# Altium PCB 人体感应灯_PCB_AltiumDesigner.pcbdoc
Units mil, origin at the board's own origin, x right, y up, seen from the top; angles counter-clockwise.
Board outline 3289.35 x 2332 mil, 2 copper layers (Top Layer, Bottom Layer); 34 components, 51 nets, 137 pads, 62 vias.
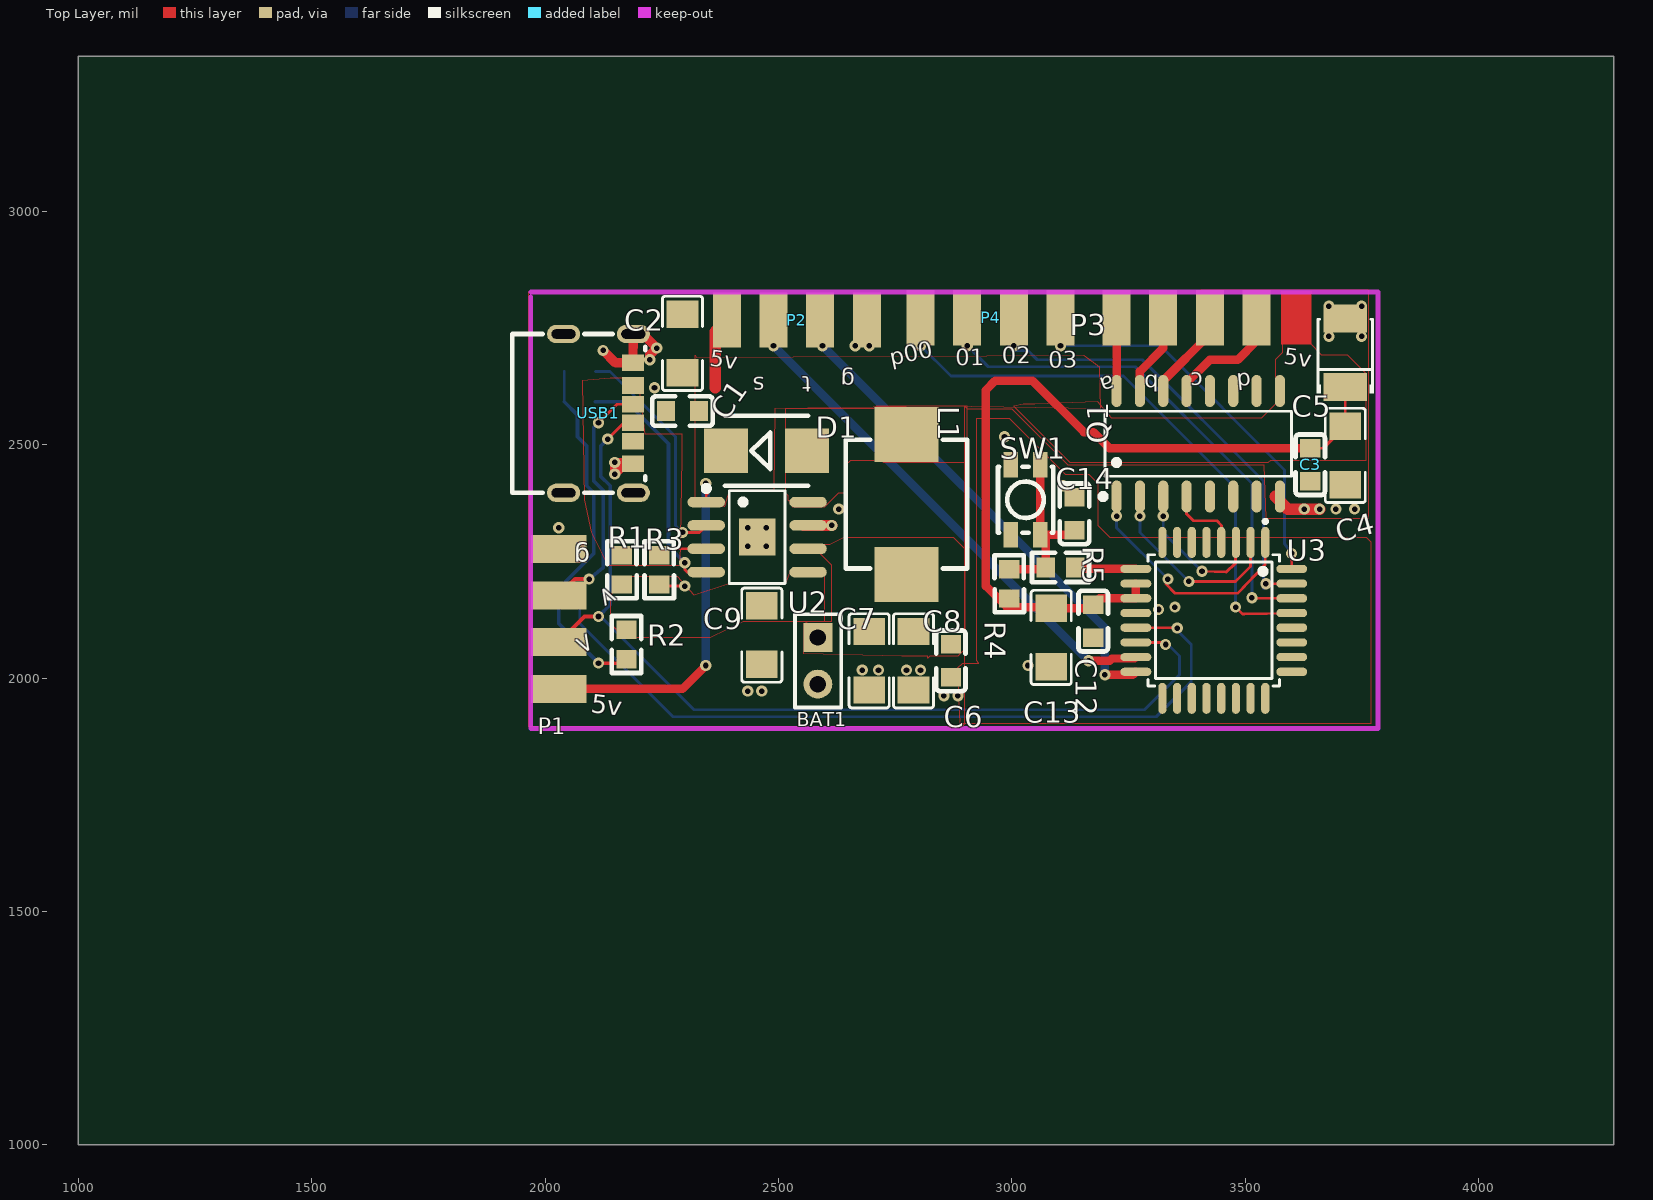
[diagram p0: Top Layer view]
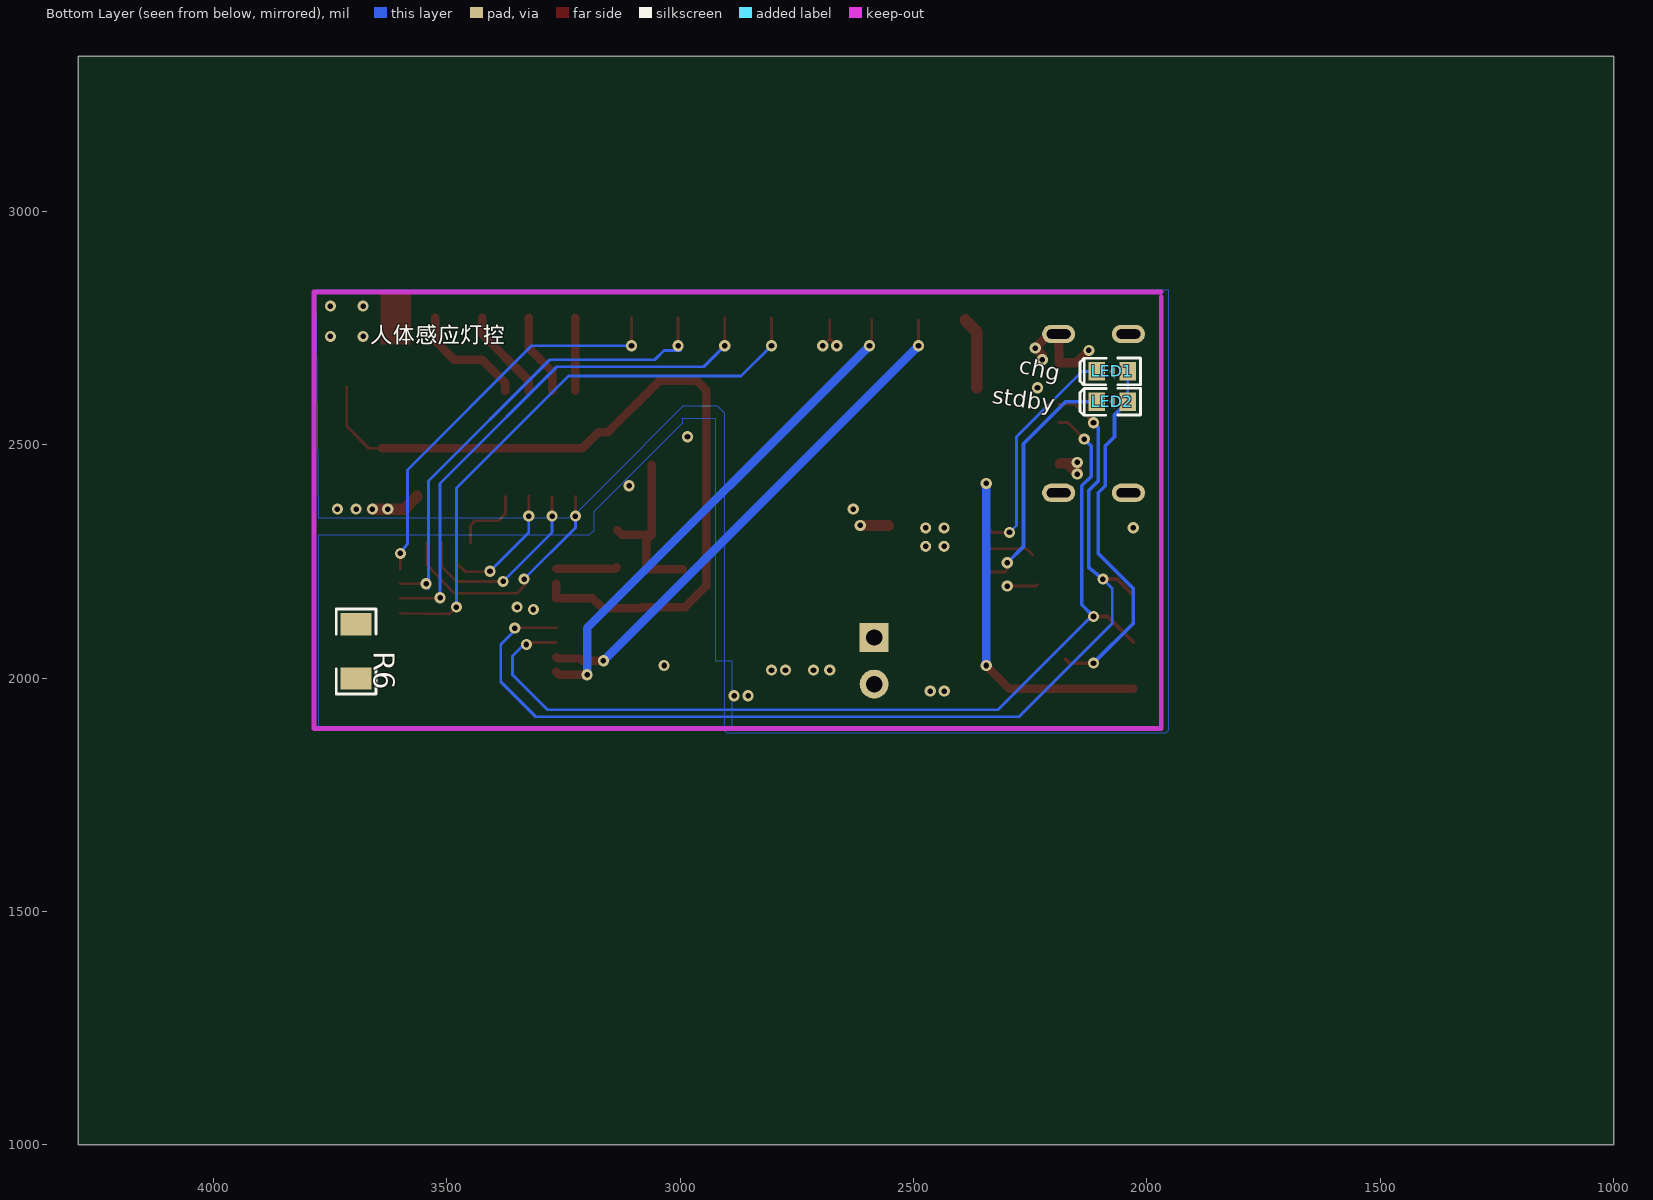
[diagram p1: Bottom Layer view, seen from below]

## Layer stack, top to bottom
Top Layer: signal copper (thickness not stored)
Dielectric: dielectric 12.6, FR-4, Dk 4.8
Bottom Layer: signal copper (thickness not stored)

## Board outline
4289.35,1000 1000,1000 1000,3332 4289.35,3332

## Components (designator, comment, footprint, x,y, rotation, side; value= is the part's Value field where it differs from the comment)
BAT1 "HDR-F-2.54_1x2" HDR-F-2.54_1X2 2584.36,2037 r270 top
C1 "0.1u" C0603 2294.36,2572 r0 top
C2 "47u" C1206 2294.36,2717 r270 top
C3 "0.1u" C0603 3639.36,2457 r90 top
C4 "22u" C1206 3714.36,2477 r90 top
C5 "100u" CASE-B_3528 3714.36,2697 r90 top
C6 "0.1u" C0603 2869.39,2037 r90 top
C7 "47u" C1206 2694.36,2037 r90 top
C8 "47u" C1206 2789.36,2037 r90 top
C9 "10u" C1206 2464.36,2092 r90 top
C12 "0.1u" C0603 3174.36,2122 r90 top
C13 "22u" C1206 3084.36,2087 r90 top
C14 "10u" C0603 3134.36,2352 r270 top
D1 "SS34" SMB -1525.64,5487 r0 top
L1 "10uH" 0630电感 2774.36,2372 r270 top
LED1 "LED-0603_R" LED0603_RED 2074.36,2657 r180 bottom
LED2 "LED-0603_R" LED0603_RED 2074.36,2592 r180 bottom
P1 "串口" 焊盘-2.54-4P 2029.36,1977 r90 top
P2 "外设传感" 焊盘-2.54-4P 2689.36,2767 r180 top
P3 "电机" 焊盘-2.54-4P 3224.36,2772 r0 top
P4 "引出" 焊盘-2.54-4P 3104.36,2772 r180 top
Q1 "ULN2003" SOP-16_L10.0-W3.9-P1.27-LS6.0-BL 3399.36,2502 r0 top
R1 "0.3" R0603 2164.36,2232 r270 top
R2 "1k" R0603 2174.36,2072 r90 top
R3 "1.1k" R0603 2244.36,2232 r270 top
R4 "10k" R0603 2994.36,2202 r270 top
R5 "310" R0603 3104.36,2237 r0 top
R6 "R1206" R1206 3694.36,2057 r90 bottom
SW1 "TS-1090S-AR01826" SW-SMD_4P-L3.5-W3.0-P1.50-LS4.7 3029.36,2382 r270 top
U2 "TP5400" SOIC-8_L5.0-W4.0-P1.27-LS6.0-BL-EP 2454.36,2302 r270 top
U3 "STC8H1K28-36I-LQFP32" LQFP-32_L7.0-W7.0-P0.80-LS9.0-BL 3432.76,2123.6 r180 top
USB1 "TYPEC-250D-BCP6" USB-C-SMD_TYPEC-250D-BCP6 2114.36,2567 r270 top
? "" ? 1738.18,2355.74 r0 top
? "" ? 2874.36,1704.98 r0 top

## Footprints (in the part's own frame and the unit in brackets; to place one, negate y for a bottom-side part, rotate by r counter-clockwise, add the part's x,y. Pads: shape width x height; smd on the part's side, far side on the other; paste and mask are expansions set on the pad)
0630电感 [mm]
  rect 3x3.5 smd: 1(-3.81,0) 2(3.81,0)
  silkscreen extent -3.51,-3.3 3.49,3.3
C0603 [mm]
  rect 1x1.1 smd: 1(-0.9,0) 2(0.9,0)
  silkscreen extent -1.65,-0.8 1.65,0.8
C1206 [mm]
  rect 1.485x1.728 smd: 1(-1.593,0) 2(1.593,0)
  silkscreen extent -2.56,-1.09 2.56,1.09
CASE-B_3528 [mil]
  rect 59.3x93.54 smd: 1(-73.25,0) 2(73.25,0)
  silkscreen extent -87,-61 72,61
HDR-F-2.54_1X2 [mil]
  rect 62x62 hole 35: 1(-50,0)
  round 62 hole 35: 2(50,0)
  silkscreen extent -100,-49 100,50
LED0603_RED [mm]
  rect 0.9x1 smd: 1(0.85,0) 2(-0.85,0)
  silkscreen extent -1.75,-0.73 1.54,0.73
LQFP-32_L7.0-W7.0-P0.80-LS9.0-BL [mm]
  oval 0.448x1.684 smd: 1(-2.8,-4.242) 2(-2,-4.242) 3(-1.2,-4.242) 4(-0.4,-4.242) 5(0.4,-4.242) 6(1.2,-4.242) 7(2,-4.242) 8(2.8,-4.242) 17(2.8,4.242) 18(2,4.242) 19(1.2,4.242) 20(0.4,4.242) 21(-0.4,4.242) 22(-1.2,4.242) 23(-2,4.242) 24(-2.8,4.242)
  oval 1.684x0.448 smd: 9(4.242,-2.8) 10(4.242,-2) 11(4.242,-1.2) 12(4.242,-0.4) 13(4.242,0.4) 14(4.242,1.2) 15(4.242,2) 16(4.242,2.8) 25(-4.242,2.8) 26(-4.242,2) 27(-4.242,1.2) 28(-4.242,0.4) 29(-4.242,-0.4) 30(-4.242,-1.2) 31(-4.242,-2) 32(-4.242,-2.8)
  silkscreen extent -3.58,-5.48 3.58,3.58
R0603 [mm]
  rect 1x1.1 smd: 1(-0.8,0) 2(0.8,0)
  silkscreen extent -1.55,-0.8 1.55,0.81
R1206 [mil]
  rect 47.54x66.97 smd: 1(58.22,0) 2(-58.22,0)
  silkscreen extent -91,-42 91,42
SMB [mil]
  rect 94.5x94.5 smd: A(4087,-3000) C(3913,-3000)
  silkscreen extent 3911,-3075 4089,-2925
SOIC-8_L5.0-W4.0-P1.27-LS6.0-BL-EP [mm]
  oval 0.574x2.038 smd: 1(-1.905,-2.769) 2(-0.635,-2.769) 3(0.635,-2.769) 4(1.905,-2.769) 5(1.905,2.769) 6(0.635,2.769) 7(-0.635,2.769) 8(-1.905,2.769)
  round 0.6 hole 0.3: 9(-0.5,0.5) 9(-0.5,-0.5) 9(0.5,0.5) 9(0.5,-0.5)
  rect 2x2 smd: 9(0,0)
  silkscreen extent -2.79,-2.92 2.53,1.52
SOP-16_L10.0-W3.9-P1.27-LS6.0-BL [mm]
  oval 0.56x1.745 smd: 1(-4.445,-2.873) 2(-3.175,-2.873) 3(-1.905,-2.873) 4(-0.635,-2.873) 5(0.635,-2.873) 6(1.905,-2.873) 7(3.175,-2.873) 8(4.445,-2.873) 9(4.445,2.873) 10(3.175,2.873) 11(1.905,2.873) 12(0.635,2.873) 13(-0.635,2.873) 14(-1.905,2.873) 15(-3.175,2.873) 16(-4.445,2.873)
  silkscreen extent -5.33,-3.02 5.08,1.77
SW-SMD_4P-L3.5-W3.0-P1.50-LS4.7 [mm]
  rect 1.4x0.8 smd: 1(-1.9,0.8) 2(1.9,0.8) 3(1.9,-0.8) 4(-1.9,-0.8)
  silkscreen extent -1.8,-1.5 1.8,1.5
USB-C-SMD_TYPEC-250D-BCP6 [mm]
  oval 1x1.8 hole 0.5 slot 1.3 at 90 deg: 1(-4.32,1.9) 2(-4.32,-1.9) 3(4.32,-1.9) 4(4.32,1.9)
  rect 0.9x1.2 smd: A5(-0.5,1.88) A9(1.52,1.88) A12(2.75,1.88) B5(0.5,1.88) B9(-1.52,1.88) B12(-2.75,1.88)
  silkscreen extent -4.32,-4.69 4.32,2.55
焊盘-2.54-4P [mil]
  rect 60x118.11 smd: 1(0,0) 2(100,0) 3(200,0) 4(300,0)
? [mil]

## Via types
v1: diameter 24, hole 12, Top Layer to Bottom Layer, 62 vias

## Nets (pads, with @x,y where several pads share a name; then routed paths per layer and width w, separated by ;. In a path a pad name is that pad's centre, name@x,y a point inside that pad or via, vN(x,y) a via of type N, cw(c..) or ccw(c..) an arc to the next point about the centre after c; other vN are vias at no path point)
+5V: C1.2 C2.2 C3.2 C4.2 C5.1 C12.2 C13.2 D1.C P1.1 P2.4 Q1.9 R4.2 U2.1 U3.10 U3.11 | length 2667.8
  Top Layer w6: v1(2344.36,2417) 2349.36,2412 2349.36,2397 2345.34,2392.98 U2.1 ; C3.2 3667.09,2492.43 C4.2 C5.1@3714.36,2623.75
  Top Layer w18: P1.1 2294.36,1977 v1(2344.36,2027) ; U3.10 U3.11 3187.76,2170.84 C12.2 3166.62,2149.7 C13.2 3082.05,2152 2989.36,2152 2944.36,2197 2944.36,2617 2964.36,2637 3044.36,2637 3154.36,2527 3174.36,2527 3208.92,2492.43 C3.2
  Top Layer w25: 2364.36,2622 2364.36,2742 P2.4
  Bottom Layer w18: v1(2344.36,2027) 2344.36,2082.54 v1(2344.36,2417)
BAT: BAT1.1 C6.2 C7.2 C8.2 L1.2 U2.6
DIN1: Q1.1 U3.1 | length 517.3
  Top Layer w6: v1(3224.36,2347) Q1.1 ; v1@3330.05,2201.5 3350.05,2181.5 3484.36,2182 3542.97,2243 U3.1
  Bottom Layer w6: v1(3224.36,2347) 3224.36,2322 v1(3334.36,2212)
DIN2: Q1.2 U3.2 | length 422.3
  Top Layer w6: v1(3274.36,2347) Q1.2 ; v1(3379.36,2207) 3479.36,2207 3509.36,2237 3511.47,2239.12 U3.2
  Bottom Layer w6: v1(3274.36,2347) 3274.36,2312 v1(3379.36,2207)
DIN3: Q1.3 U3.3 | length 317.9
  Top Layer w6: v1(3324.36,2347) Q1.3 ; v1(3407.47,2228.88) 3459.36,2227 3479.36,2246.15 ; 3479.36,2247 3479.36,2290.01 U3.3
  Bottom Layer w6: v1(3324.36,2347) 3324.36,2312 v1(3407.47,2228.88)
DIN4: Q1.4 U3.4 | length 159
  Top Layer w6: Q1.4 3374.36,2352 3389.36,2337 3439.36,2337 3449.36,2327 3449.36,2291.5 U3.4
DOUT1: P3.1 Q1.16 | length 156.9
  Top Layer w18: Q1.16 3224.36,2727 P3.1
DOUT2: P3.2 Q1.15 | length 177.6
  Top Layer w18: Q1.15 3274.36,2657 3324.36,2707 P3.2
DOUT3: P3.3 Q1.14 | length 198.3
  Top Layer w18: Q1.14 3324.36,2637 3424.36,2737 P3.3
DOUT4: P3.4 Q1.13 | length 254.2
  Top Layer w18: Q1.13 3374.36,2632 3424.36,2682 3484.36,2682 3524.36,2722 P3.4
GND: BAT1.2 C1.1 C2.1 C3.1 C4.1 C5.2 C6.1 C7.1 C8.1 C9.1 C12.1 C13.1 C14.1 P1.4 P2.1 Q1.8 R3.2 SW1.3 SW1.4 U2.7 U2.9 U3.12 USB1.1 USB1.2 USB1.3 USB1.4 USB1.A12 USB1.B12 | length 776.3
  Top Layer w6: R3.2@2234.36,2200.5 2237.86,2197 v1(2299.36,2197) ; v1(2664.36,2712) P2.1@2679.36,2727 ; v1(2694.36,2712) P2.1@2679.36,2727 ; P2.1@2679.36,2727 2679.36,2767 P2.1@2679.36,2727
  Top Layer w20: v1(2124.36,2702) 2151.09,2675.27 USB1.B12 ; USB1.B12 USB1.1 ; USB1.1 2209.28,2737.07 v1(2239.36,2707) 2224.36,2692 v1(2224.36,2682) ; v1(2149.36,2437) 2171.09,2458.73 USB1.A12 2185.11,2462 v1(2149.36,2462) v1(2149.36,2437)
  Top Layer w24: U2.7@2553.38,2327 v1(2614.36,2327)
  Top Layer w25: v1@3629.36,2362 3591.26,2362 ; v1(3659.36,2362) 3591.26,2362 ; 3591.26,2362 3564.36,2388.91 3591.26,2362
  other v1: 2854.36,1962 2884.36,1962 2434.36,1972 2464.36,1972 2679.36,2017 2714.36,2017 2774.36,2017 2804.36,2017 3034.36,2027 3314.36,2147 3349.36,2152 2029.36,2322 2629.36,2362 3626.68,2362 3694.36,2362 3734.36,2362 3109.36,2412 2984.36,2517 2234.36,2622 3679.36,2732 3749.36,2732 3679.36,2797 3749.36,2797
HSENSOR: P2.3 U3.15 | length 1114.2
  Top Layer w6: v1(2489.36,2712) P2.3
  Top Layer w18: v1(3164.36,2037) 3209.36,2037 3214.36,2042 3262.89,2042 U3.15
  Bottom Layer w18: v1(2489.36,2712) v1(3164.36,2037)
LED2_1: LED1.1 LED2.1 R2.1 | length 781.1
  Top Layer w8: v1(2114.36,2032) 2165.84,2032 R2.1
  Bottom Layer w6: LED2.1 LED1.1
  Bottom Layer w8: LED2.1 2069.36,2563.53 2069.36,2517 2089.36,2497 2089.36,2412 2104.36,2397 2104.36,2267 2029.36,2192 2029.36,2117 v1(2114.36,2032)
MCU_RX: P1.3 U3.13 USB1.A5 | length 2274.6
  Top Layer w6: v1(2114.36,2547) 2154.05,2586.7 USB1.A5 ; U3.13@3265.76,2107.8 v1(3354.36,2107)
  Top Layer w8: P1.3 2064.36,2212 v1(2094.36,2212)
  Bottom Layer w6: v1(2094.36,2212) 2074.36,2192 2074.36,2117 2274.36,1917 2334.36,1917 3309.36,1917 3384.36,1992 3384.36,2072 3354.36,2102 v1(3354.36,2107)
  Bottom Layer w8: v1(2094.36,2212) 2124.36,2237 2124.36,2402 2104.36,2422 2104.36,2537 v1(2114.36,2547)
MCU_TX: P1.2 U3.14 USB1.B5 | length 2085.9
  Top Layer w6: v1(2134.36,2512) 2169.66,2547.3 USB1.B5 ; U3.14@3265.76,2076.4 3314.66,2076.4 3324.95,2076.4 v1(3329.36,2072)
  Top Layer w8: P1.2 2084.36,2132 v1(2114.36,2132)
  Bottom Layer w6: v1(2114.36,2132) 2119.36,2132 2319.36,1932 3284.36,1932 3359.36,2007 3359.36,2047 3334.36,2072 v1(3329.36,2072)
  Bottom Layer w8: v1(2114.36,2132) 2139.36,2157 2139.36,2412 2119.36,2432 2119.36,2497 v1(2134.36,2512)
P0.0: P4.4 U3.29 | length 1246.5
  Top Layer w6: v1(2804.36,2712) P4.4 ; v1(3479.36,2152) 3494.29,2137.07 3497.87,2137.07 ; 3494.36,2137 U3.29@3599.76,2139
  Bottom Layer w6: v1(2804.36,2712) 2869.36,2647 3239.36,2647 3439.36,2447 3479.36,2407 v1(3479.36,2152)
P0.1: P4.3 U3.30 | length 1123.2
  Top Layer w6: v1(2904.36,2712) P4.3 ; v1(3514.36,2172) 3515.51,2170.84 U3.30
  Bottom Layer w6: v1(2904.36,2712) 2949.36,2667 3264.49,2667 3480.46,2451.03 3514.36,2417.14 v1(3514.36,2172)
P0.2: P4.2 U3.31 | length 1001.4
  Top Layer w6: v1(3004.36,2712) P4.2 ; v1(3544.36,2202) U3.31
  Bottom Layer w6: v1@2999.36,2702 3034.36,2702 3054.36,2682 3279.36,2682 3539.36,2422 v1@3539.36,2192
P0.3: P4.1 U3.32 | length 867.3
  Top Layer w6: v1(3104.36,2712) P4.1 ; v1(3599.36,2267) U3.32
  Bottom Layer w6: v1(3104.36,2712) 3318.16,2712 3584.36,2445.8 3584.36,2287 v1(3599.36,2267)
P1.4: U3.5
P1.5: U3.6
P1.6: U3.7
P1.7: U3.8
P2.0: U3.21
P2.1: U3.22
P2.2: U3.23
P2.3: U3.24
P2.4: U3.25
P2.5: U3.26
P2.6: U3.27
P2.7: U3.28
P3.4: U3.17
P3.5: U3.18
P3.6: U3.19
P3.7: U3.20
Q1_5: Q1.5
Q1_6: Q1.6
Q1_7: Q1.7
Q1_10: Q1.10
Q1_11: Q1.11
Q1_12: Q1.12
R1_1: R1.1 USB1.A9 USB1.B9
RST: R5.2 U3.9 | length 131.2
  Top Layer w18: R5.2 3139.01,2233.84 U3.9
STDBY: LED2.2 U2.4 | length 526.3
  Top Layer w6: v1(2299.36,2247) 2299.36,2232 2304.36,2227 U2.4
  Bottom Layer w8: LED2.2@2107.86,2592 2174.36,2592 2264.36,2502 2264.36,2282 v1(2299.36,2247)
SW1_2: C14.2 R4.1 R5.1 SW1.1 SW1.2 | length 382.1
  Top Layer w18: R4.1 3069.36,2233.5 R5.1 3072.86,2295.2 SW1.2 ; SW1.1 SW1.2 ; C14.2 3124.99,2307.2 SW1.2
TOUCHOUT: P2.2 U3.16 | length 1081.7
  Top Layer w6: P2.2 2589.36,2717 v1(2594.36,2712)
  Top Layer w18: v1(3199.36,2007) 3259.39,2007 U3.16
  Bottom Layer w18: v1(2594.36,2712) 3199.36,2107 v1(3199.36,2007)
U1_8: 
U2_2: LED1.2 U2.2 | length 497.9
  Top Layer w6: v1(2294.36,2312) 2330.34,2312 U2.2
  Bottom Layer w6: LED1.2 2139.36,2657 2279.36,2517 2279.36,2327 v1(2294.36,2312)
U2_3: R3.1 U2.3 | length 106.6
  Top Layer w6: R3.1 2257.86,2277 U2.3
U2_5: C9.2 R1.2 R2.2 U2.5
U2_8: D1.A L1.1 U2.8
pads on no net: R6.1 R6.2

## Polygon pours and split planes (outlines as drawn)
GND on Bottom Layer (solid): 2889.36,1892 3769.36,1892 3774.36,1897 3774.36,2307 3194.36,2307 3184.36,2317 3184.36,2357 2994.36,2547 2994.36,2557 2924.36,2557 2924.36,2037 2889.36,2037
GND on Bottom Layer (solid): 1954.36,2832 1954.36,1887 1959.36,1882 2899.36,1882 2904.36,1887 2904.36,2567 2919.36,2582 2994.36,2582 3154.36,2422 3214.36,2362 3229.36,2347 3234.36,2347 3239.36,2342 3774.36,2342 3779.36,2832
GND on Top Layer (solid): 2884.36,2022 2894.36,2032 2929.36,2032 2924.36,2037 2924.36,2557 2994.36,2557 3114.36,2437 3164.36,2437 3184.36,2417 3184.36,2327 3209.36,2302 3759.36,2302 3769.36,2292 3769.36,1902 2889.36,1902
GND on Top Layer (solid): 1964.36,2827 1964.36,1897 2894.36,1897 2899.36,1902 2899.36,2582 2904.36,2577 2999.36,2577 3119.36,2457 3244.36,2457 3539.36,2457 3544.36,2342 3764.36,2342 3764.36,2832
+5V on Top Layer (solid): 3579.36,2727 3579.36,2697 3564.36,2682 3564.36,2587 3539.36,2562 3534.36,2557 3214.36,2557 3184.36,2592 3049.36,2587 3024.36,2587 3004.36,2582 3124.36,2462 3549.36,2462 3554.36,2467 3759.36,2467 3759.36,2652 3719.36,2692 3664.36,2692 3639.36,2717 3639.36,2722
U2_8 on Top Layer (solid): 2709.36,2582 2704.36,2577 2514.36,2577 2514.36,2397 2519.36,2392 2519.36,2382 2529.36,2372 2529.36,2367 2599.36,2367 2629.36,2397 2644.36,2397 2644.36,2457 2654.36,2467 2719.36,2467 2724.36,2462 2904.36,2462 2904.36,2582
U2_5 on Top Layer (solid): 2144.36,2217 2144.36,2182 2139.36,2177 2139.36,2117 2164.36,2092 2169.36,2087 2354.36,2087 2424.36,2122 2599.36,2122 2599.36,2227 2524.36,2227 2514.36,2202 2394.36,2202 2319.36,2177 2284.36,2217
R1_1 on Top Layer (solid): 2079.36,2637 2084.36,2382 2099.36,2312 2134.36,2242 2289.36,2242 2294.36,2472 2294.36,2522 2214.36,2522 2199.36,2642 2139.36,2642
+5V on Top Layer (solid): 2321.86,2377 2321.86,2687 2321.86,2692 2324.36,2687 3154.36,2692 3186.86,2667 3186.86,2662 3189.36,2577 2844.36,2582 2491.86,2577 2489.36,2402 2394.36,2402 2384.36,2367
BAT on Top Layer (solid): 2579.36,2287 2609.36,2287 2639.36,2302 2874.36,2302 2899.36,2277 2899.36,2062 2884.36,2047 2824.36,2047 2819.36,2042 2819.36,2047 2764.36,2047 2554.36,2052 2554.36,2117 2564.36,2122 2614.36,2122 2614.36,2242 2584.36,2272 2579.36,2272

## Other copper
Top Layer:
  rectangle net +5V: 3576.86,2714.5 3641.86,2829.5
  pour cut-out net U1_8: 2654.36,2462 2899.36,2462 2899.36,2307 2879.36,2302 2839.36,2302 2774.36,2302 2664.36,2302 2644.36,2302 2649.36,2457 2654.36,2457
Bottom Layer:
  pour cut-out: 2649.36,2449.5 2899.36,2449.5 2899.36,2294.5 2889.36,2294.5 2649.36,2299.5

## Silkscreen, mask and mechanical layers (free items; w line width, h text height)
Top Overlay:
  text "g" at 2664.36,2667 h60 r179
  text "c" at 3409.36,2667 h60 r181
  text "d" at 3509.36,2667 h60 r186
  text "02" at 2979.36,2662 h60 r1
  text "a" at 3209.36,2662 h60 r198
  text "b" at 3314.36,2662 h60 r180
  text "5v" at 3579.36,2662 h60 r352
  text "5v" at 2349.36,2657 h60 r352
  text "s" at 2469.36,2657 h60 r182
  text "t" at 2569.36,2657 h60 r181
  text "p00" at 2744.36,2657 h60 r12
  text "01" at 2879.36,2657 h60 r1
  text "03" at 3079.36,2652 h60 r1
  text "g" at 2096.45,2279.1 h40 r180
  text "<" at 2106.86,2187.3 h40 r299
  text "<" at 2111.85,2061.7 h40 r119
  text "5v" at 2096.92,1927.15 h40 r353
Bottom Overlay:
  text "人体感应灯控" at 3664.36,2707 h60
  text "chg" at 2279.36,2642 h60 r12
  text "stdby" at 2334.36,2577 h60 r8
Top Paste:
  rectangle net +5V: 3579.36,2707 3644.36,2822
Top Solder:
  rectangle: 3574.36,2702 3649.36,2827
  rectangle: 3579.36,2707 3644.36,2822